# Altium PCB PCB1.PcbDoc
Units mm, origin at the board's own origin, x right, y up, seen from the top; angles counter-clockwise.
Board outline 18 x 10.5 mm, 6 copper layers (Top Layer 1, VCC, GND, sygnaly 1, syngaly 2, Bottom Layer 1), stack 0.815 mm thick; 18 components, 17 nets, 70 pads, 18 vias.
Unrouted connection lines stored in the file: 18.
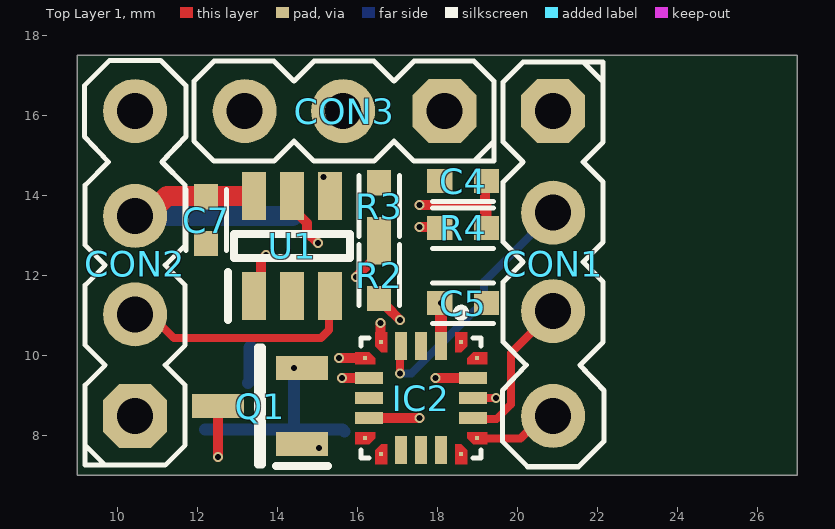
[diagram p0: Top Layer 1 view]
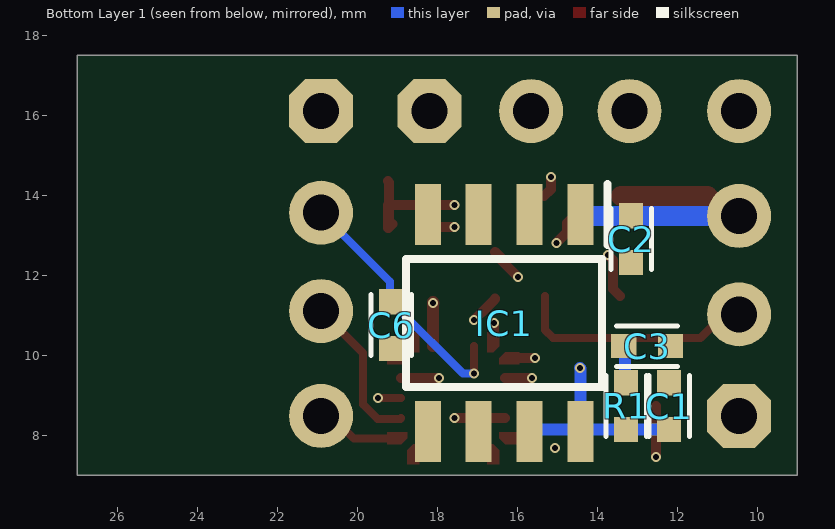
[diagram p1: Bottom Layer 1 view, seen from below]
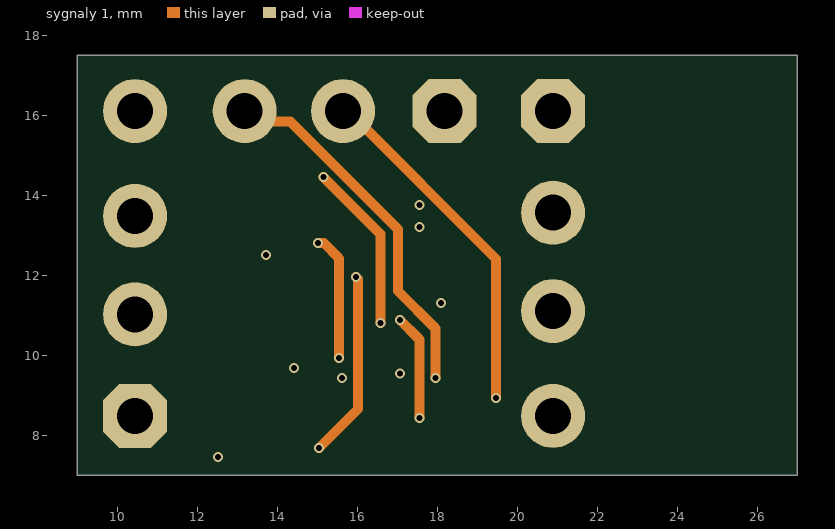
[diagram p2: sygnaly 1]
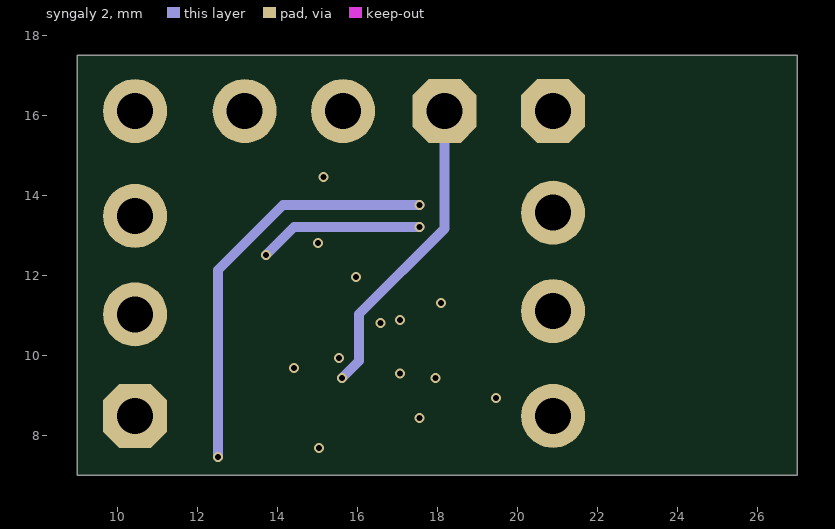
[diagram p3: syngaly 2]
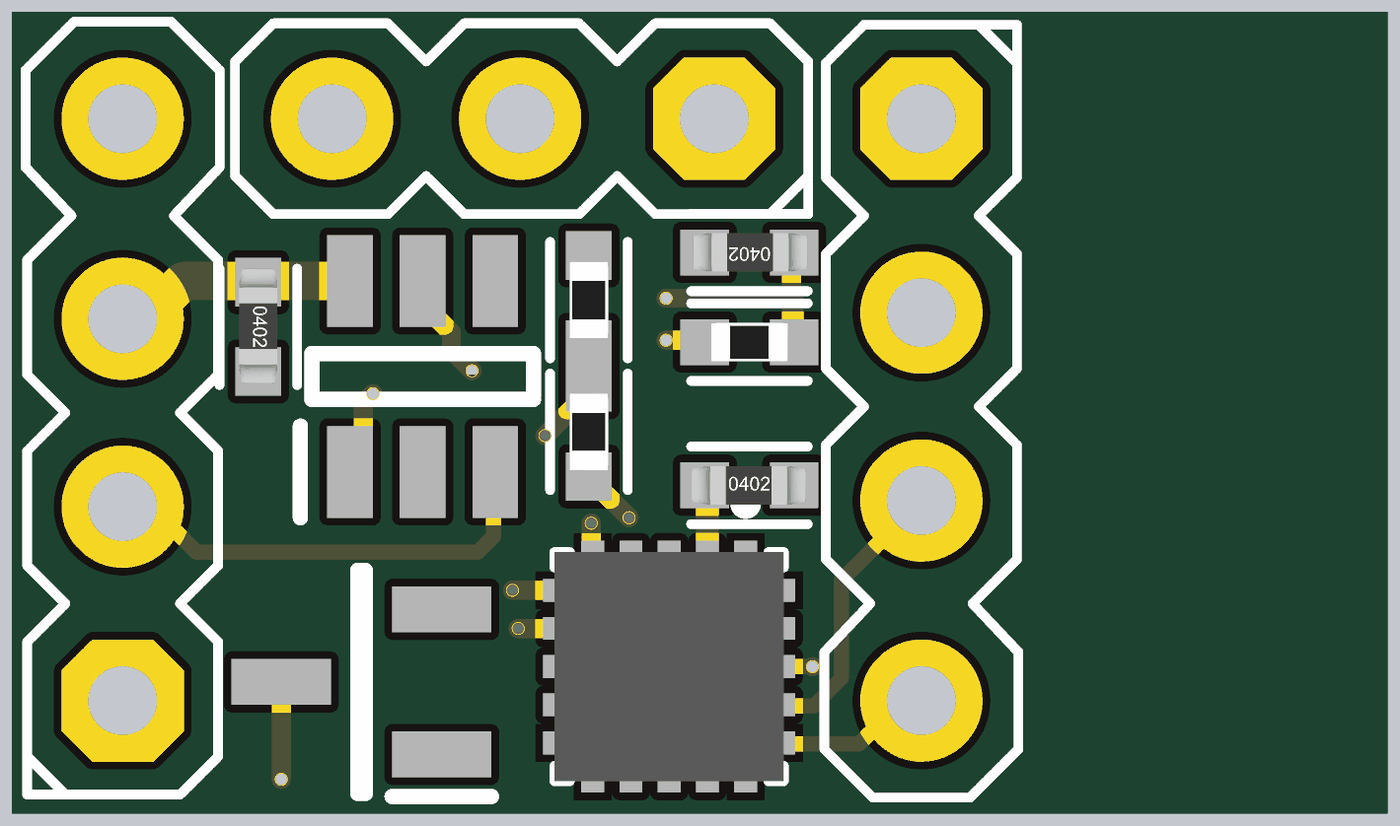
[diagram p4: 3D render of the assembled board from above, using the file's embedded part models]
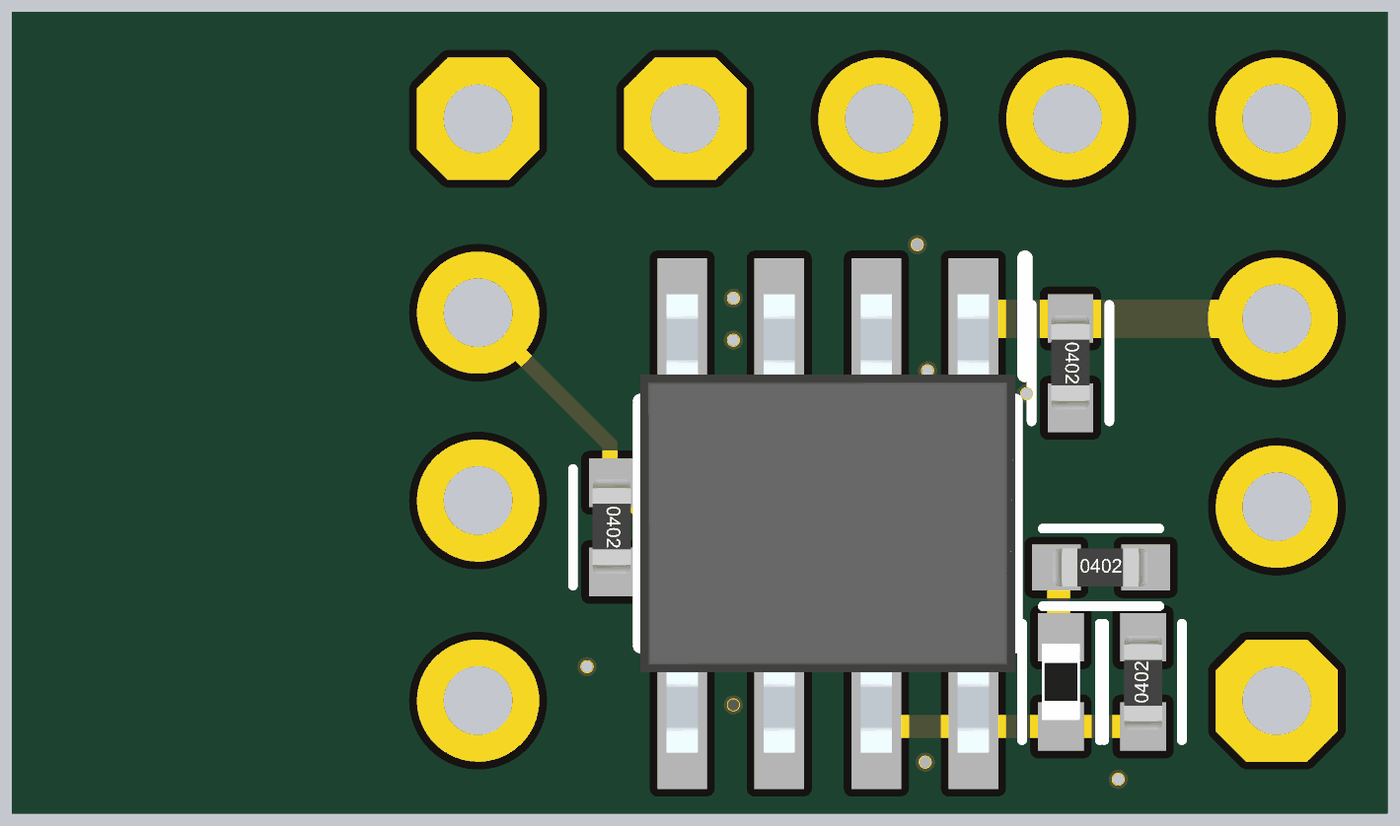
[diagram p5: 3D render of the assembled board from below, using the file's embedded part models]

## Layer stack, top to bottom
Top Solder: solder mask 0.0102, Solder Resist, Dk 3.5
Top Layer 1: signal copper 0.035
Dielectric 2: prepreg 0.0711, PP-006, Dk 4.1
VCC: signal copper 0.035
Dielectric 3: prepreg 0.0711, PP-006, Dk 4.1
GND: signal copper 0.035
Dielectric 1: dielectric 0.32, FR-4, Dk 4.8
sygnaly 1: signal copper 0.035
Dielectric 8: prepreg 0.0711, PP-006, Dk 4.1
syngaly 2: signal copper 0.035
Dielectric 9: prepreg 0.0711, PP-006, Dk 4.1
Bottom Layer 1: signal copper 0.035
Bottom Solder: solder mask 0.0102, Solder Resist, Dk 3.5

## Board outline
9,7 9,17.5 27,17.5 27,7

## Design rules (kind name [scope] priority, off if disabled: settings)
BoardOutlineClearance [All] p1: gap=0.3 ignorepadtopadclearanceinfootprint=FALSE
Clearance [All] p1: gap=0.15 ignorepadtopadclearanceinfootprint=TRUE
ComponentClearance [All] p1: gap=-5 collisioncheckmode=3 verticalgap=-5 showdistances=FALSE
HoleSize [All] p1: absolutevalues=TRUE maxlimit=4 minlimit=0.02 maxpercent=80.000 minpercent=20.000
HoleToHoleClearance [All] p1: gap=0.127 allowstackedmicrovias=TRUE
PlaneClearance [All] p1: clearance=0.3
PlaneConnect PlaneConnect_1 [(HasFootprint('R 2512'))] p1: planeconnectstyle=Relief reliefexpansion=0.508 reliefentries=4 reliefconductorwidth=0.254 reliefairgap=0.254
PlaneConnect [All] p2: planeconnectstyle=Relief reliefexpansion=0.508 reliefentries=4 reliefconductorwidth=0.254 reliefairgap=0.254
PolygonConnect "Polygon Power Connection" [(HasFootprint('DFN 5x6')) OR  (HasFootprint('R 2512')) OR  IsVia OR  HasFootprint('SMD PAD')  OR  (HasFootprint('DJNR60454R5FERROCORE'))  OR  (HasFootprint ('SON50P200X200X80-9N-D')) OR (HasFootprint('SOT230P700X180-4N'))  OR    InNetClass('Power')] p1: connectstyle=Direct reliefconductorwidth=0.254 reliefentries=4 polygonreliefangle="90 Angle" airgapwidth=0.254 // Conection to high power components
PolygonConnect [All] p2: connectstyle=Relief reliefconductorwidth=0.254 reliefentries=4 polygonreliefangle="90 Angle" airgapwidth=0.254
RoutingVias [All] p1: holewidth=0.3 width=0.5 viastyle="Through Hole" minholewidth=0.15 minwidth=0.25 maxholewidth=1 maxwidth=1.27
SilkToSilkClearance [All] p1: silktosilkclearance=0.127
SolderMaskExpansion "Tented Vias" [IsVia] p1: expansion=0.102 istentingtop=TRUE
SolderMaskExpansion [All] p2: expansion=0.102 istentingtop=FALSE
Width [All] p1: maxlimit=1 minlimit=0.127 preferedwidth=0.3 midlayer1_maxwidth=0.508 midlayer2_maxwidth=0.508 midlayer3_maxwidth=0.508 midlayer4_maxwidth=0.508 minimp=50.000000 maximp=50.000000 favimp=50.000000
24 further rules are at their usual default settings.

## Components (designator, comment, footprint, x,y, rotation, side; value= is the part's Value field where it differs from the comment)
C1 "1nF" "C 0402" 12.2,8.725 r90 bottom
C2 "2.2uF" "C 0402" 13.15,12.9 r270 bottom
C3 "2.2uF" "C 0402" 12.75,10.225 r180 bottom
C4 "4.7uF" "C 0402" 18.65,14.35 r180 top
C5 "100nF" "C 0402" 18.65,11.3 r0 top
C6 "1nF" "C 0402" 19.15,10.75 r270 bottom
C7 "100nF" "C 0402" 12.225,13.375 r270 top
CON1 "4 PIN" "Goldpin 2.54 4P" 20.9,12.29 r270 top
CON2 "4 PIN" "Goldpin 2.54 4P" 10.45,12.29 r90 top
CON3 "3 Pin" "Goldpin 2.54 3P" 15.65,16.1 r180 top
IC1 "MCP1501-30E_SN" SOIC127P600X175-8N 16.325,10.8 r270 bottom
IC2 "STM32C011" 20-UFQFPN 17.6,8.925 r270 top
Q1 "IRLML6344TRPBF" SOT95P237X112-3N 13.575,8.725 r180 top
R1 "50R" "R 0402" 13.275,8.725 r270 bottom
R2 "47R" "R 0402" 16.55,12 r90 top
R3 "10k" "R 0402" 16.55,13.725 r270 top
R4 "10k" "R 0402" 18.65,13.175 r0 top
U1 "LMV761MFX_NOPB" SOT95P280X145-6N 14.375,12.725 r90 top

## Footprints (in the part's own frame and the unit in brackets; to place one, negate y for a bottom-side part, rotate by r counter-clockwise, add the part's x,y. Pads: shape width x height; smd on the part's side, far side on the other; paste and mask are expansions set on the pad)
20-UFQFPN [mm]
  rect 0.1x0.1 smd paste-1 mask+0: 1(-1.4,1) 5(-1.4,-1) 6(-1,-1.4) 10(1,-1.4) 11(1.4,-1) 15(1.4,1) 16(1,1.4) 20(-1,1.4)
  rect 0.7x0.3 smd: 2(-1.3,0.5) 3(-1.3,0) 4(-1.3,-0.5) 12(1.3,-0.5) 13(1.3,0) 14(1.3,0.5)
  rect 0.3x0.7 smd: 7(-0.5,-1.3) 8(0,-1.3) 9(0.5,-1.3) 17(0.5,1.3) 18(0,1.3) 19(-0.5,1.3)
  Top Layer 1 region: -1.15,-1 -1.3,-1.15 -1.65,-1.15 -1.65,-0.85 -1.15,-0.85
  Top Layer 1 region: 1.65,0.85 1.15,0.85 1.15,1 1.3,1.15 1.65,1.15
  Top Layer 1 region: 1.15,-1.3 1.15,-1.65 0.85,-1.65 0.85,-1.15 1,-1.15
  Top Layer 1 region: -0.85,1.15 -1,1.15 -1.15,1.3 -1.15,1.65 -0.85,1.65
  Top Layer 1 region: 1.15,1.3 1,1.15 0.85,1.15 0.85,1.65 1.15,1.65
  Top Layer 1 region: -1.15,1 -1.15,0.85 -1.65,0.85 -1.65,1.15 -1.3,1.15
  Top Layer 1 region: -0.85,-1.65 -1.15,-1.65 -1.15,-1.3 -1,-1.15 -0.85,-1.15
  Top Layer 1 region: 1.65,-1.15 1.3,-1.15 1.15,-1 1.15,-0.85 1.65,-0.85
  silkscreen extent -2.23,-1.5 1.5,1.5, body extent -1.5,-1.5 1.5,1.5, height 0.6
"C 0402" [mm] "MLCC Capacitor 0402"
  rect 0.635x0.6 smd: 1(-0.584,0) 2(0.584,0)
  silkscreen extent -0.76,-0.51 0.76,0.51, body extent -0.76,-0.25 0.74,0.25, height 0.35
"Goldpin 2.54 3P" [mm]
  oct 1.6x1.6 hole 0.9: 1(-2.54,0)
  round 1.6 hole 0.9: 2(0,0) 3(2.46,0)
  silkscreen extent -3.77,-1.25 3.73,1.25
"Goldpin 2.54 4P" [mm]
  oct 1.6x1.6 hole 0.9: 1(-3.81,0)
  round 1.6 hole 0.9: 2(-1.27,0) 3(1.19,0) 4(3.81,0)
  silkscreen extent -5.04,-1.27 5.08,1.27
"R 0402" [mm] "0402 resistor Chip"
  rect 0.635x0.6 smd: 1(-0.584,0) 2(0.584,0)
  silkscreen extent -0.76,-0.51 0.76,0.51, body extent -0.5,-0.25 0.5,0.25, height 0.31
SOIC127P600X175-8N [mm]
  rect 1.525x0.65 smd: 1(-2.712,1.905) 2(-2.712,0.635) 3(-2.712,-0.635) 4(-2.712,-1.905) 5(2.712,-1.905) 6(2.712,-0.635) 7(2.712,0.635) 8(2.712,1.905)
  silkscreen extent -3.47,-2.45 1.6,2.58, body extent -3,-2.45 3,2.45, height 1.75
SOT95P237X112-3N [mm]
  rect 1.3x0.6 smd: 1(-1.05,0.95) 2(-1.05,-0.95) 3(1.05,0)
  silkscreen extent -1.7,-1.46 0.05,1.5, body extent -1.18,-1.46 1.18,1.46, height 1.12
SOT95P280X145-6N [mm]
  rect 1.2x0.6 smd: 1(-1.25,0.95) 2(-1.25,0) 3(-1.25,-0.95) 4(1.25,-0.95) 5(1.25,0) 6(1.25,0.95)
  silkscreen extent -1.85,-1.45 0.3,1.6, body extent -1.4,-1.45 1.4,1.45, height 1.2

## Part data
C1 C2 C3 C4 C5 C6 C7: library part Capacitor, "MLCC Capacitor"
IC1: "Integrated Circuit", Arrow Part Number=MCP1501-30E/SN, Manufacturer_Name=Microchip, Mouser Part Number=579-MCP1501-30E/SN, Arrow Price/Stock=https://www.arrow.com/en/products/mcp1501-30esn/microchip-technology?utm_currency=USD&region=nac, Datasheet Link=http://ww1.microchip.com/downloads/en/DeviceDoc/20005474E.pdf, Height=1.75mm, Manufacturer_Part_Number=MCP1501-30E/SN, Mouser Price/Stock=https://www.mouser.co.uk/ProductDetail/Microchip-Technology/MCP1501-30E-SN?qs=BA62vJVifGo5%252B6Z65Dge2g%3D%3D
IC2: library part STM32C011F4U, "UFQFPN 20"
Q1: "MOSFET (N-Channel)", Manufacturer_Name=Infineon, Mouser Part Number=942-IRLML6344TRPBF, Arrow Part Number=IRLML6344TRPBF, Arrow Price/Stock=https://www.arrow.com/en/products/irlml6344trpbf/infineon-technologies-ag?utm_currency=USD&region=nac, Datasheet Link=https://www.infineon.com/dgdl/irlml6344pbf.pdf?fileId=5546d462533600a4015356689c44262c, Height=1.12mm, Manufacturer_Part_Number=IRLML6344TRPBF, Mouser Price/Stock=https://www.mouser.co.uk/ProductDetail/Infineon-Technologies/IRLML6344TRPBF?qs=9%252BKlkBgLFf2w4qS48UOXVw%3D%3D
R1 R2 R3 R4: library part Resistor, "General pourpouse resistor"
U1: "Undefined or Miscellaneous", Arrow Part Number=LMV761MFX/NOPB, Manufacturer_Name="Texas Instruments", Mouser Part Number=926-LMV761MFX/NOPB, Arrow Price/Stock=https://www.arrow.com/en/products/lmv761mfxnopb/texas-instruments?region=nac, Datasheet Link=http://www.ti.com/lit/gpn/lmv761, Height=1.45mm, Manufacturer_Part_Number=LMV761MFX/NOPB, Mouser Price/Stock=https://www.mouser.co.uk/ProductDetail/Texas-Instruments/LMV761MFX-NOPB?qs=7lkVKPoqpbaXVbo0E6mk2g%3D%3D

## Via types
v1: diameter 0.25, hole 0.15, Top Layer 1 to Bottom Layer 1, tented both sides, 15 vias
v2: diameter 0.25, hole 0.15, Top Layer 1 to Bottom Layer 1, tented bottom, 3 vias

## Nets (pads, with @x,y where several pads share a name; then routed paths per layer and width w, separated by ;. In a path a pad name is that pad's centre, name@x,y a point inside that pad or via, vN(x,y) a via of type N, cw(c..) or ccw(c..) an arc to the next point about the centre after c; other vN are vias at no path point)
3.3V: C2.1 C5.1 C7.1 CON2.3 IC1.1 IC1.3 IC2.2 U1.6 | length 8.3
  Top Layer 1 w0.25: C5.1 18.1,11.334 v2(18.1,11.3)
  Top Layer 1 w0.3: IC2.2 C5.1@18.1,11.334
  Top Layer 1 w0.5: CON2.3 10.748,13.48 11.243,13.975 U1.6@13.4,13.975
  Bottom Layer 1 w0.5: CON2.3 C2.1@13.138,13.48 ; C2.1@13.15,13.48 14.388,13.48 IC1.1
3v_reference: C1.1 IC1.7 IC1.8 Q1.2 R1.2 | length 5.1
  Bottom Layer 1 w0.3: C1.1 R1.2 IC1.8@14.42,8.141 ; IC1.8 IC1.8@14.42,8.141 ; v2(14.425,9.675) 14.42,9.67 IC1.8@14.42,8.141 ; IC1.7 15.637,8.141 IC1.8@14.42,8.141
comparator_enable: IC2.6 U1.5 | length 5.3
  Top Layer 1 w0.25: U1.5 14.375,13.675 14.75,13.3 14.75,13.07 v1(15.02,12.8) ; v1(15.55,9.925) IC2.6
  sygnaly 1 w0.25: v1(15.02,12.8) 15.17,12.8 15.55,12.42 v1(15.55,9.925)
comparator_fb: IC2.5 U1.4 | length 5.3
  Top Layer 1 w0.25: v1(15.154,14.451) 15.154,14.146 U1.4 ; v1(16.581,10.804) 16.581,10.344 IC2.5
  sygnaly 1 w0.25: v1(15.154,14.451) 16.581,13.025 v1(16.581,10.804)
external_trigger: CON3.1 IC2.7 | length 8.4
  Top Layer 1 w0.25: v1(15.625,9.425) IC2.7
  syngaly 2 w0.25: v1(15.625,9.425) 16.05,9.85 16.05,11.025 18.19,13.165 CON3.1
GND: C1.2 C2.2 C3.2 C4.2 C5.2 C6.2 C7.2 CON1.1 CON2.1 CON2.4 IC1.2 IC1.4 IC1.5 IC1.6 IC2.3 R3.1 U1.2
NetC3_1: C3.1 R1.1 | length 0.9
  Bottom Layer 1 w0.3: R1.1 13.305,9.339 13.305,10.195 C3.1
NetC4_1: C4.1 Q1.3 R4.2 | length 15.1
  Top Layer 1 w0.25: v1(12.525,7.45) Q1.3 ; v1(17.56,13.75) 19.2,13.75 ; R4.2@19.116,13.275 19.217,13.175 R4.2 19.234,13.75 19.2,13.75 ; R4.2@19.2,13.359 19.2,13.75 ; C4.1 19.2,14.316 19.2,13.75
  syngaly 2 w0.25: v1(12.525,7.45) 12.525,12.125 14.15,13.75 v1(17.56,13.75)
NetIC2_9: IC2.9 R2.1 | length 4.7
  Top Layer 1 w0.25: IC2.9 v1(17.56,8.425) ; R2.1 16.55,11.398 16.725,11.223 16.727,11.223 v1(17.075,10.875)
  sygnaly 1 w0.25: v1(17.075,10.875) 17.556,10.394 17.556,8.429 v1(17.56,8.425)
NetQ1_1: Q1.1 R2.2 R3.2 | length 5.6
  Top Layer 1 w0.25: v1(15.975,11.95) 16.375,12.35 16.375,12.409 R2.2
  sygnaly 1 w0.25: v2(15.05,7.675) 16.025,8.65 16.025,11.9 v1(15.975,11.95)
NetR4_1: R4.1 U1.1 | length 5.8
  Top Layer 1 w0.25: U1.1 13.6,11.65 13.6,12.375 v1(13.725,12.5) ; v1(17.56,13.2) 18.041,13.2 R4.1
  syngaly 2 w0.25: v1(13.725,12.5) 14.425,13.2 v1(17.56,13.2)
NRST: C6.1 CON1.2 IC2.4 | length 6.5
  Top Layer 1 w0.2: v1(17.075,9.539) IC2.4@17.075,10.225
  Bottom Layer 1 w0.2: v1(17.075,9.539) 17.354,9.539 18.932,11.117 18.95,11.117 19.15,11.317 C6.1 19.175,11.359 19.175,11.835 CON1.2
SWCLK: CON1.3 IC2.17 | length 3.9
  Top Layer 1 w0.2: IC2.17 18.916,8.409 19.489,8.409 19.85,8.77 19.85,10.05 CON1.3@20.897,11.097
SWDIO: CON1.4 IC2.16 | length 2.1
  Top Layer 1 w0.2: IC2.16@18.986,7.914 20.083,7.914 20.649,8.48 CON1.4
UART_RX: CON3.3 IC2.19 | length 10.1
  Top Layer 1 w0.25: v1(17.956,9.425) IC2.19
  sygnaly 1 w0.25: CON3.3 13.448,15.842 14.33,15.842 17.025,13.146 17.025,11.6 17.956,10.669 v1(17.956,9.425)
UART_TX: CON3.2 IC2.18 | length 9.4
  Top Layer 1 w0.2: IC2.18 v1(19.475,8.925)
  sygnaly 1 w0.25: CON3.2 15.776,16.1 19.475,12.401 v1(19.475,8.925)
voltage_input: CON2.2 U1.3 | length 6
  Top Layer 1 w0.2: CON2.2 10.822,11.02 11.417,10.425 15.098,10.425 15.3,10.627 U1.3@15.3,11.475
pads on no net: IC2.1 IC2.8 IC2.10 IC2.11 IC2.12 IC2.13 IC2.14 IC2.15 IC2.20

## Polygon pours and split planes (outlines as drawn)
3.3V on VCC "NONET_L-01_P-001" (solid, shelved, pour order 0): 9,7 22.5,7 22.5,17.5 9,17.5